# EAGLE board OpenBook_EBookReader_PCB_updated (EAGLE 9.7.0)
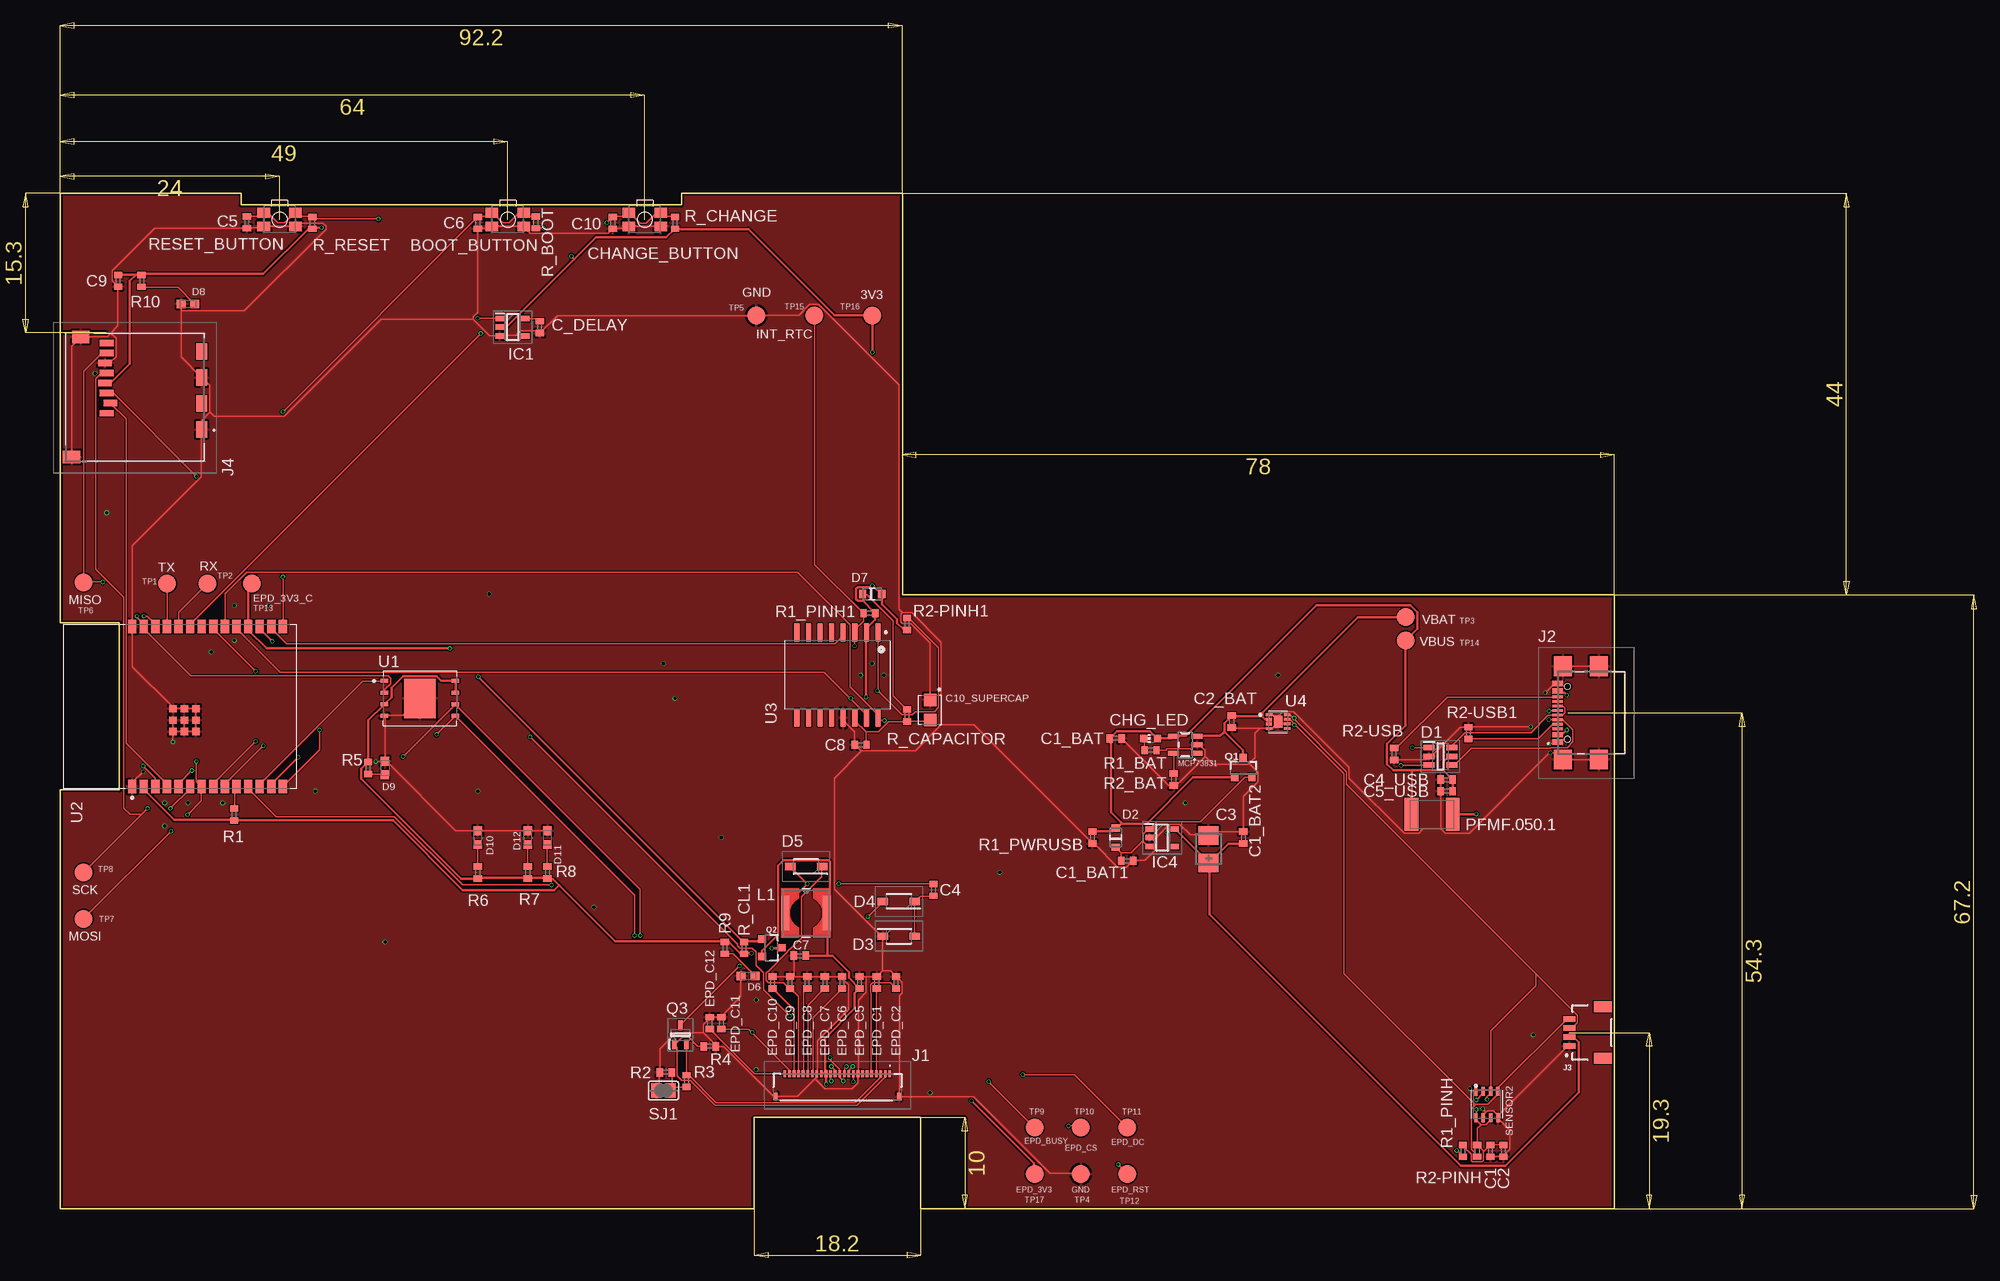
[diagram p0: board, top side]
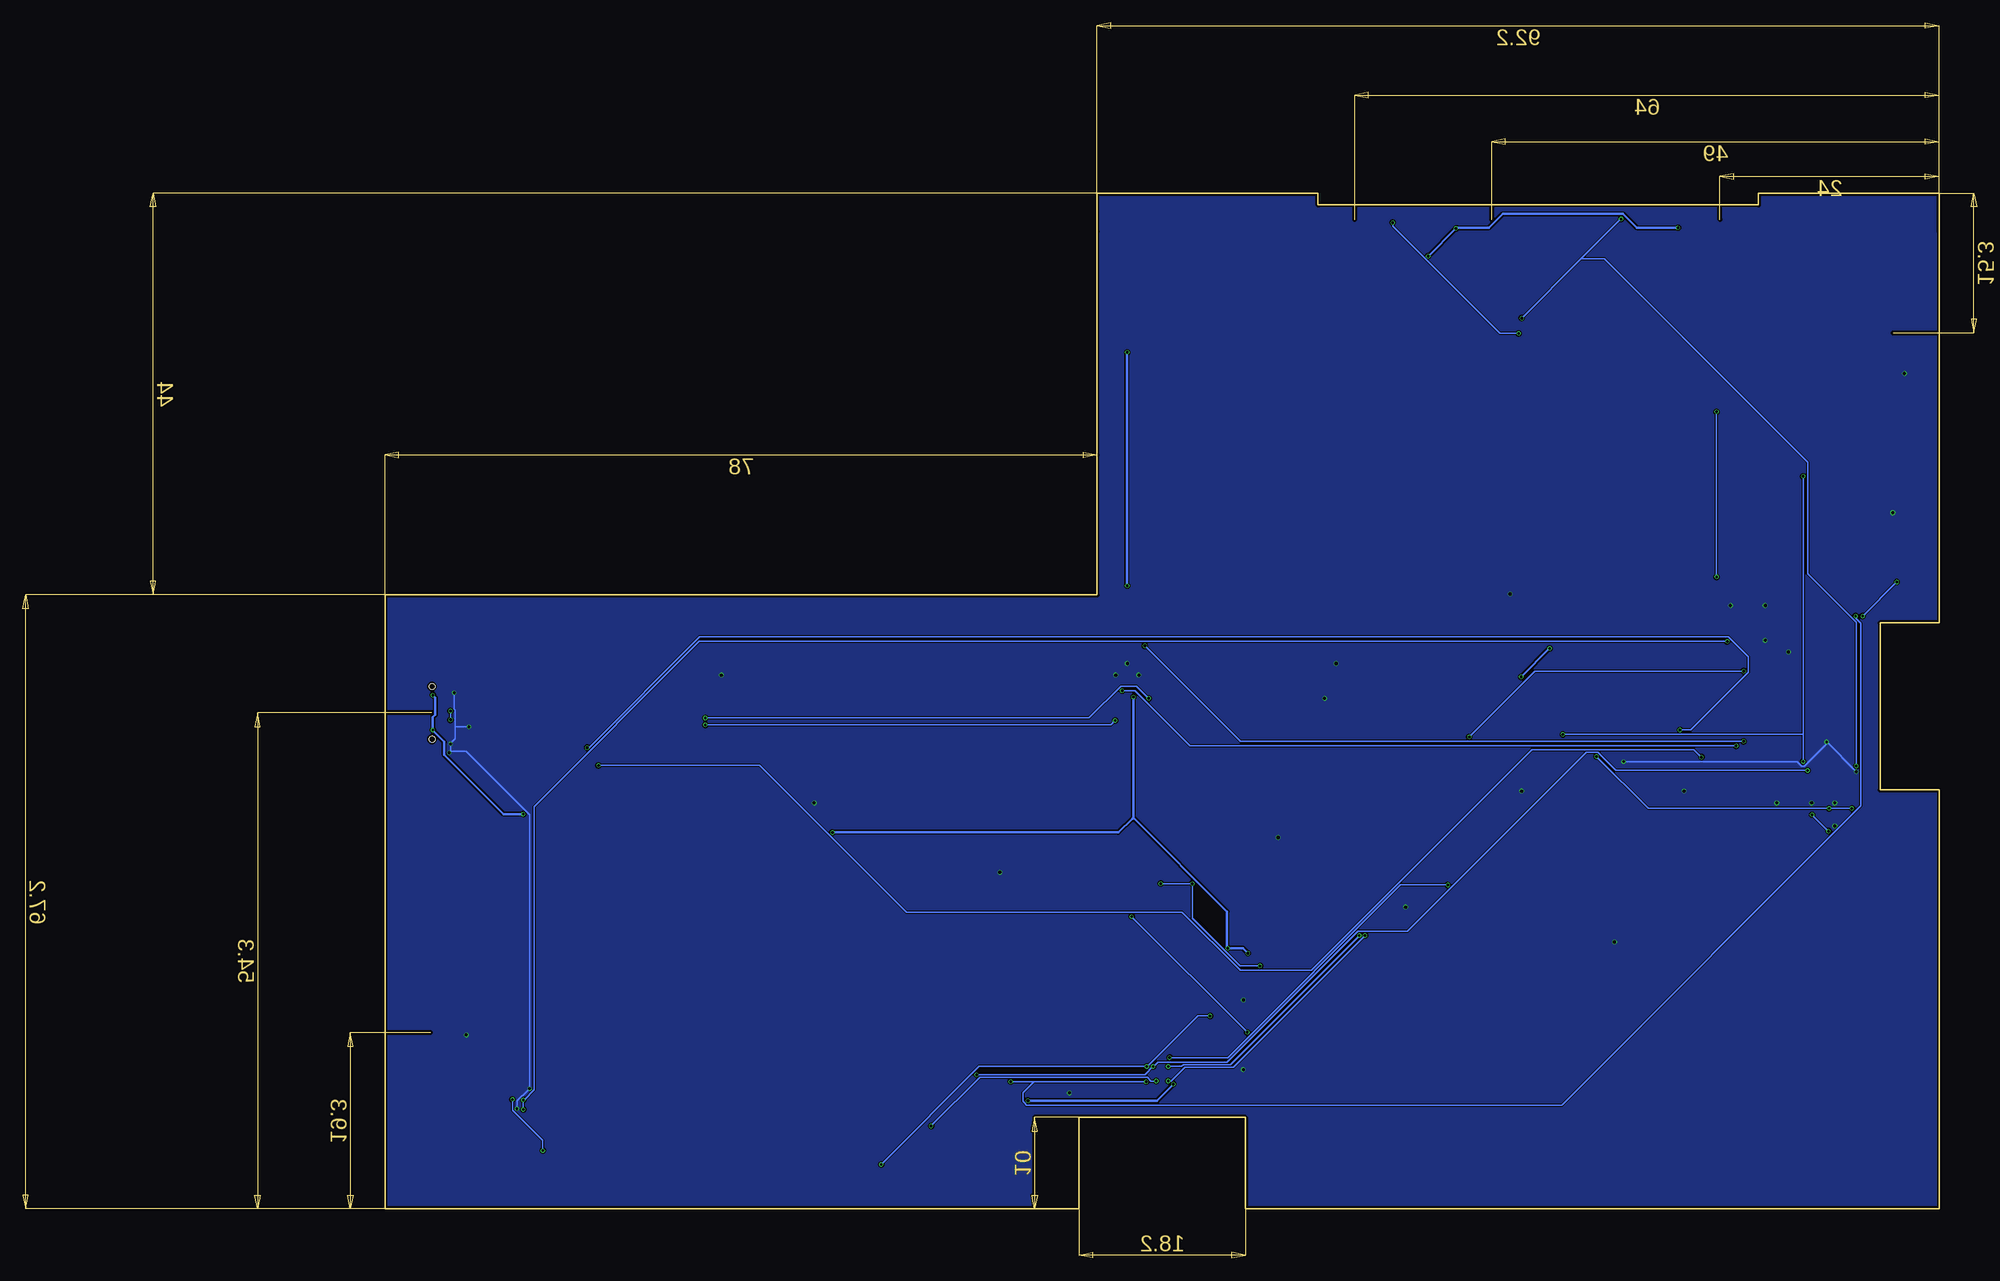
[diagram p1: board, bottom side, seen from below]

Size 170.2 x 111.2 mm. Coordinates in mm from the lower left corner, seen from the top.
Outline: 0,111.2 0,64.14 6.47,64.14 6.47,45.85 0,45.85 0,0 75.99,0 75.99,10 94.19,10 94.19,0 170.2,0 170.2,67.2 92.2,67.2 92.2,111.2 68,111.2 68,109.91 19.8,109.91 19.8,111.2 0,111.2
Copper layers (1*16): Top 0.035mm / dielectric 1.6mm / Bottom 0.035mm
Design rules "jlcpcb-2layers.dru *": minimum track width 0.15mm, minimum drill 0.3mm, track to track 5mil, track to pad 5mil, pad to pad 5mil, via to via 5mil, smd to smd 5mil, copper to edge 0.2mm, drill to drill 6mil, minimum pad ring 10mil, minimum via ring 3mil, stop-mask expansion 4mil, vias tented up to drill 0mil, thermal gap 10mil
Net classes: 1 PowerSignals: width 0.3 mm

## Footprints (pad centres in the part's own frame; a part is rotated, then mirrored left to right if it is on the bottom)
MYBUTTON = smd 1.4 x 1.05: 1 1.75,0.75; 2 -1.75,0.75; 3 -1.75,-0.75; 4 1.75,-0.75
ESP32_WROVER_EAGLE-LTSPICE_C0402 = smd 0.7 x 0.9: 1 -0.65,0; 2 0.65,0
RCL_CT3528 = smd 2 x 2.2: + -1.5,0; - 1.5,0
CAPCP3225X100N = smd 1.4 x 1.4: 1 -1.1,0; 2 1.1,0
ADAFRUIT_CHIP-LED0603 = smd 0.8 x 0.8: A 0,-0.75; C 0,0.75
SOT95P280X145-6N = smd 1.2 x 0.6: 1 -1.25,0.95; 2 -1.25,0; 3 -1.25,-0.95; 4 1.25,-0.95; 5 1.25,0; 6 1.25,0.95
ESP32_WROVER_AVX---SD0805S020S1R0_AVX_SD0805S020S1R0_0 = smd 0.8 x 0.9: 1 -1.05,0; 2 1.05,0
SOD3716X135N = smd 1.15 x 0.8: 1 -1.75,0; 2 1.75,0
DIOC1608X36N = smd 0.97 x 0.94: 1 -0.75,0; 2 0.75,0
SOT95P280X125-5N = smd 0.9 x 0.6: 1 -1.4,0.95; 2 -1.4,0; 3 -1.4,-0.95; 4 1.4,-0.95; 5 1.4,0.95
SOT95P280X120-5N = smd 0.9 x 0.6: 1 -1.4,0.95; 2 -1.4,0; 3 -1.4,-0.95; 4 1.4,-0.95; 5 1.4,0.95
FH34SRJ24S05SH99 = smd 0.3 x 0.8: 1 5.75,1.45; 2 5.25,1.45; 3 4.75,1.45; 4 4.25,1.45; 5 3.75,1.45; 6 3.25,1.45; 7 2.75,1.45; 8 2.25,1.45; 9 1.75,1.45; 10 1.25,1.45; 11 0.75,1.45; 12 0.25,1.45; 13 -0.25,1.45; 14 -0.75,1.45; 15 -1.25,1.45; 16 -1.75,1.45; 17 -2.25,1.45; 18 -2.75,1.45; 19 -3.25,1.45; 20 -3.75,1.45; 21 -4.25,1.45; 22 -4.75,1.45; 23 -5.25,1.45; 24 -5.75,1.45 | smd 0.4 x 0.8: MP1 6.75,-1.05; MP2 -6.75,-1.05
SAMACSYS_PARTS_USB4110GFA = smd 0.3 x 1.15: A1 -3.35,3.678; A4 -2.55,3.678; A5 -1.25,3.678; A6 -0.25,3.678; A7 0.25,3.678; A8 1.25,3.678; A9 2.55,3.678; A12 3.35,3.678; B1 3.05,3.678; B4 2.25,3.678; B5 1.75,3.678; B6 0.75,3.678; B7 -0.75,3.678; B8 -1.75,3.678; B9 -2.25,3.678; B12 -3.05,3.678 | smd 2.18 x 2: MP1 -5.11,-0.827; MP2 5.11,-0.827; MP3 -5.11,3.103; MP4 5.11,3.103 | hole 0.65: -2.89,2.603; 2.89,2.603
JST04_1MM_RA = smd 0.6 x 1.35: 1 -1.5,0; 2 -0.5,0; 3 0.5,0; 4 1.5,0 | smd 1.2 x 2: NC1 2.8,-3.675; NC2 -2.8,-3.675
112ATAARR03ATTEND = smd 1.8 x 1.2: G1 10.6,10.4; G2 4.9,10.4; S1 7.75,10.4; S2 2.05,10.4 | smd 1.4 x 1.9: G3 13.6,-3.85; G4 0.45,-2.85 | smd 0.7 x 1.5: P1 8.8,0; P2 7.7,0.4; P3 6.6,0; P4 5.5,-0.2; P5 4.4,0; P6 3.3,-0.2; P7 2.2,0; P8 1.1,0
IND_4828-WE-TPC_WRE = smd 0.889 x 3.81: 1 -2.286,0; 2 2.286,0
ESP32_WROVER_SPARKFUN-IC-POWER_SOT23-5 = smd 0.55 x 1.2: 1 -0.95,-1.3; 2 0,-1.3; 3 0.95,-1.3; 4 0.95,1.3; 5 -0.95,1.3
ESP32C6_VARISTOR_CT/CN1812 = smd 1.5 x 3.6: 1 -2.25,0; 2 2.25,0
ESP32_WROVER_SPARKFUN-DISCRETESEMI_SOT23-3 = smd 0.8 x 0.9: 1 -0.95,-1; 2 0.95,-1; 3 0,1.1
SOT65P210X110-3N = smd 1.05 x 0.5: 1 -1.05,0.65; 2 -1.05,-0.65; 3 1.05,0
ESP32_WROVER_EAGLE-LTSPICE_R0402 = smd 0.7 x 0.9: 1 -0.65,0; 2 0.65,0
ESP32_WROVER_BME680_PSON80P300X300X100-8N = smd 1.016 x 0.5: 1 1.458,1.2; 2 1.458,0.4; 3 1.458,-0.4; 4 1.458,-1.2; 5 -1.458,-1.22; 6 -1.458,-0.4; 7 -1.458,0.4; 8 -1.458,1.2
SJ = smd 1.168 x 1.6: 1 -0.762,0; 2 0.762,0
TP20R = smd 2 x 2: TP 0,0
SON127P600X800X80-9N = smd 0.94 x 0.44: 1 -3.895,1.905; 2 -3.895,0.635; 3 -3.895,-0.635; 4 -3.895,-1.905; 5 3.895,-1.905; 6 3.895,-0.635; 7 3.895,0.635; 8 3.895,1.905 | smd 3.4 x 4.3: 9 0,0
XCVR_ESP32-C6-WROOM-1-N8 = smd 1.5 x 0.9: 1 -8.75,5.26; 2 -8.75,3.99; 3 -8.75,2.72; 4 -8.75,1.45; 5 -8.75,0.18; 6 -8.75,-1.09; 7 -8.75,-2.36; 8 -8.75,-3.63; 9 -8.75,-4.9; 10 -8.75,-6.17; 11 -8.75,-7.44; 12 -8.75,-8.71; 13 -8.75,-9.98; 14 -8.75,-11.25; 15 8.75,-11.25; 16 8.75,-9.98; 17 8.75,-8.71; 18 8.75,-7.44; 19 8.75,-6.17; 20 8.75,-4.9; 21 8.75,-3.63; 22 8.75,-2.36; 23 8.75,-1.09; 24 8.75,0.18; 25 8.75,1.45; 26 8.75,2.72; 27 8.75,3.99; 28 8.75,5.26 | smd 0.8 x 0.8: 29_1 -2.755,0.79; 29_2 -1.505,0.79; 29_3 -0.255,0.79; 29_4 -2.755,-0.46; 29_5 -1.505,-0.46; 29_6 -0.255,-0.46; 29_7 -2.755,-1.71; 29_8 -1.505,-1.71; 29_9 -0.255,-1.71
SOIC127P1032X265-16N = smd 2.05 x 0.59: 1 -4.655,4.445; 2 -4.655,3.175; 3 -4.655,1.905; 4 -4.655,0.635; 5 -4.655,-0.635; 6 -4.655,-1.905; 7 -4.655,-3.175; 8 -4.655,-4.445; 9 4.655,-4.445; 10 4.655,-3.175; 11 4.655,-1.905; 12 4.655,-0.635; 13 4.655,0.635; 14 4.655,1.905; 15 4.655,3.175; 16 4.655,4.445
SON50P200X200X80-9N = smd 0.76 x 0.27: 1 -0.985,0.75; 4 -0.985,-0.75; 5 0.985,-0.75; 6 0.985,-0.25; 7 0.985,0.25; 8 0.985,0.75 | smd 0.762 x 0.381: 2 -0.985,0.25; 3 -0.985,-0.25 | smd 0.9 x 1.3: 9 0,0

## Placement (x,y rotation side)
BOOT_BUTTON  BUTTON_CUSYOMV1  [MYBUTTON]  49,108.3 180 top
C1  100nF  [ESP32_WROVER_EAGLE-LTSPICE_C0402]  156.6,6.35 270 top
C1_BAT  4.7uF  [ESP32_WROVER_EAGLE-LTSPICE_C0402]  115.57,51.5 0 top
C1_BAT1  4.7uF  [ESP32_WROVER_EAGLE-LTSPICE_C0402]  116.84,38.1 0 top
C1_BAT2  4.7uF  [ESP32_WROVER_EAGLE-LTSPICE_C0402]  129.54,40.64 90 top
C2  100nF  [ESP32_WROVER_EAGLE-LTSPICE_C0402]  158.03,6.35 270 top
C2_BAT  4.7uF  [ESP32_WROVER_EAGLE-LTSPICE_C0402]  128.27,53.34 270 top
C3  100uF TANT  [RCL_CT3528]  125.73,39.37 90 top
C4  4.7uF/25V  [ESP32_WROVER_EAGLE-LTSPICE_C0402]  95.63,34.92 90 top
C4_USB  100nF  [ESP32_WROVER_EAGLE-LTSPICE_C0402]  151.8,46.99 180 top
C5  1uF  [ESP32_WROVER_EAGLE-LTSPICE_C0402]  20.42,108 270 top
C5_USB  4.7uF  [ESP32_WROVER_EAGLE-LTSPICE_C0402]  151.8,45.72 180 top
C6  100nF  [ESP32_WROVER_EAGLE-LTSPICE_C0402]  45.72,107.95 270 top
C7  10uF  [ESP32_WROVER_EAGLE-LTSPICE_C0402]  80.96,27.73 180 top
C8  100nF  [ESP32_WROVER_EAGLE-LTSPICE_C0402]  87.63,50.8 180 top
C9  100nF  [ESP32_WROVER_EAGLE-LTSPICE_C0402]  6.35,101.6 270 top
C10  100nF  [ESP32_WROVER_EAGLE-LTSPICE_C0402]  60.5,107.95 270 top
C10_SUPERCAP  CPH3225A  [CAPCP3225X100N]  95.25,54.61 270 top
C_DELAY  100nF  [ESP32_WROVER_EAGLE-LTSPICE_C0402]  52.5,96.52 270 top
CHANGE_BUTTON  BUTTON_CUSYOMV1  [MYBUTTON]  64,108.3 180 top
CHG_LED  [ADAFRUIT_CHIP-LED0603]  119.38,51.5 90 top
D1  USBLC6-2SC6Y  [SOT95P280X145-6N]  151.13,49.53 0 top
D2  ESP32_WROVER_AVX---SD0805S020S1R0_AVX_SD0805S020S1R0_0_0AVX_SD0805S020S1R0_0_0  [ESP32_WROVER_AVX---SD0805S020S1R0_AVX_SD0805S020S1R0_0]  115.57,40.64 90 top
D3  MBR0530  [SOD3716X135N]  91.82,29.84 0 top
D4  MBR0530  [SOD3716X135N]  91.82,33.66 180 top
D5  MBR0530  [SOD3716X135N]  81.66,37.47 180 top
D6  PGB1010603MR  [DIOC1608X36N]  75.31,25.5 0 top
D7  SD0805S020S1R0  [ESP32_WROVER_AVX---SD0805S020S1R0_AVX_SD0805S020S1R0_0]  88.9,67.31 0 top
D8  PGB1010603MR  [DIOC1608X36N]  13.97,99.06 0 top
D9  PGB1010603MR  [DIOC1608X36N]  35.56,48.26 270 top
D10  PGB1010603MR  [DIOC1608X36N]  45.72,40.64 270 top
D11  PGB1010603MR  [DIOC1608X36N]  51.2,40.64 270 top
D12  PGB1010603MR  [DIOC1608X36N]  53.34,40.64 270 top
EPD_C1  1uF/50V  [ESP32_WROVER_EAGLE-LTSPICE_C0402]  89.41,24.77 90 top
EPD_C2  1uF/50V  [ESP32_WROVER_EAGLE-LTSPICE_C0402]  91.52,24.77 90 top
EPD_C5  0.1uF/50V  [ESP32_WROVER_EAGLE-LTSPICE_C0402]  87.52,24.77 90 top
EPD_C6  1uF/50V  [ESP32_WROVER_EAGLE-LTSPICE_C0402]  85.6,24.77 90 top
EPD_C7  1uF/50V  [ESP32_WROVER_EAGLE-LTSPICE_C0402]  83.72,24.77 90 top
EPD_C8  1uF/50V  [ESP32_WROVER_EAGLE-LTSPICE_C0402]  81.79,24.77 90 top
EPD_C9  1uF/50V  [ESP32_WROVER_EAGLE-LTSPICE_C0402]  79.92,24.77 90 top
EPD_C10  1uF/50V  [ESP32_WROVER_EAGLE-LTSPICE_C0402]  77.98,24.77 90 top
EPD_C11  1uF/50V  [ESP32_WROVER_EAGLE-LTSPICE_C0402]  72.39,20.32 90 top
EPD_C12  1uF/50V  [ESP32_WROVER_EAGLE-LTSPICE_C0402]  71.12,20.32 90 top
IC1  BD5229G-TR  [SOT95P280X125-5N]  49.53,96.52 0 top
IC4  XC6220A331MR-G  [SOT95P280X120-5N]  120.65,40.64 0 top
J1  FH34SRJ-24S-0.5SH_99_  [FH34SRJ24S05SH99]  85.09,13.33 0 top
J2  SAMACSYS_PARTS_USB4110-GF-A  [SAMACSYS_PARTS_USB4110GFA]  167.64,54.3 90 top
J3  QWIIC_RIGHT_ANGLE  [JST04_1MM_RA]  165.25,19.3 90 top
J4  112A-TAAR-R03_ATTEND  [112ATAARR03ATTEND]  5.08,95.9 270 top
L1  68uH  [IND_4828-WE-TPC_WRE]  81.66,32.38 0 top
MCP73831  ESP32_WROVER_SPARKFUN-IC-POWER_MCP73831  [ESP32_WROVER_SPARKFUN-IC-POWER_SOT23-5]  123.19,50.8 90 top
PFMF.050.1  ESP32C6_VARISTORCN1812  [ESP32C6_VARISTOR_CT/CN1812]  150.2,43.18 180 top
Q1  20V/4.2A/52mΩ/1.4W  [ESP32_WROVER_SPARKFUN-DISCRETESEMI_SOT23-3]  129.54,48.26 0 top
Q2  20V/4.2A/52mΩ/1.4W  [ESP32_WROVER_SPARKFUN-DISCRETESEMI_SOT23-3]  77.85,28.57 270 top
Q3  SI1308EDL-T1-GE3  [SOT65P210X110-3N]  67.89,19.05 90 top
R1  10K  [ESP32_WROVER_EAGLE-LTSPICE_R0402]  19.05,43.18 90 top
R1_BAT  200  [ESP32_WROVER_EAGLE-LTSPICE_R0402]  119.38,50.2 180 top
R1_PINH  10K  [ESP32_WROVER_EAGLE-LTSPICE_R0402]  153.6,6.35 90 top
R1_PINH1  10K  [ESP32_WROVER_EAGLE-LTSPICE_R0402]  88.6,65.2 0 top
R1_PWRUSB  100K  [ESP32_WROVER_EAGLE-LTSPICE_R0402]  113.03,40.64 90 top
R2  2.2  [ESP32_WROVER_EAGLE-LTSPICE_R0402]  66.29,14.93 0 top
R2-PINH  10K  [ESP32_WROVER_EAGLE-LTSPICE_R0402]  155.15,6.35 90 top
R2-PINH1  10K  [ESP32_WROVER_EAGLE-LTSPICE_R0402]  92.71,64.03 270 top
R2-USB  5k1  [ESP32_WROVER_EAGLE-LTSPICE_R0402]  146.05,49.8 270 top
R2-USB1  5k1  [ESP32_WROVER_EAGLE-LTSPICE_R0402]  154.2,52.07 270 top
R2_BAT  2K  [ESP32_WROVER_EAGLE-LTSPICE_R0402]  121.92,46.99 90 top
R3  0.47  [ESP32_WROVER_EAGLE-LTSPICE_R0402]  68.58,13.97 270 top
R4  10K  [ESP32_WROVER_EAGLE-LTSPICE_R0402]  71.12,17.78 0 top
R5  10K  [ESP32_WROVER_EAGLE-LTSPICE_R0402]  33.7,48.26 90 top
R6  10K  [ESP32_WROVER_EAGLE-LTSPICE_R0402]  45.72,36.83 270 top
R7  10K  [ESP32_WROVER_EAGLE-LTSPICE_R0402]  51.2,36.83 270 top
R8  10K  [ESP32_WROVER_EAGLE-LTSPICE_R0402]  53.34,36.83 270 top
R9  10K  [ESP32_WROVER_EAGLE-LTSPICE_R0402]  72.77,28.57 90 top
R10  10K  [ESP32_WROVER_EAGLE-LTSPICE_R0402]  8.89,101.6 90 top
R_BOOT  10K  [ESP32_WROVER_EAGLE-LTSPICE_R0402]  52.07,108 90 top
R_CAPACITOR  15  [ESP32_WROVER_EAGLE-LTSPICE_R0402]  92.71,54 90 top
R_CHANGE  10K  [ESP32_WROVER_EAGLE-LTSPICE_R0402]  67.31,107.95 90 top
R_CL1  10K  [ESP32_WROVER_EAGLE-LTSPICE_R0402]  74.86,28.57 90 top
R_RESET  10K  [ESP32_WROVER_EAGLE-LTSPICE_R0402]  27.6,107.95 90 top
RESET_BUTTON  BUTTON_CUSYOMV1  [MYBUTTON]  24,108.3 180 top
SENSOR2  BME688  [ESP32_WROVER_BME680_PSON80P300X300X100-8N]  156.21,11.43 90 top
SJ1  [SJ]  66.04,12.94 0 top
TP1  TPTP20R  [TP20R]  11.68,68.45 0 top
TP2  TPTP20R  [TP20R]  16.13,68.45 0 top
TP3  TPTP20R  [TP20R]  147.32,64.77 0 top
TP4  TPTP20R  [TP20R]  111.76,3.81 0 top
TP5  TPTP20R  [TP20R]  76.2,97.79 0 top
TP6  TPTP20R  [TP20R]  2.54,68.58 0 top
TP7  TPTP20R  [TP20R]  2.54,31.75 0 top
TP8  TPTP20R  [TP20R]  2.54,36.83 0 top
TP9  TPTP20R  [TP20R]  106.68,8.89 0 top
TP10  TPTP20R  [TP20R]  111.76,8.89 0 top
TP11  TPTP20R  [TP20R]  116.84,8.89 0 top
TP12  TPTP20R  [TP20R]  116.84,3.81 0 top
TP13  TPTP20R  [TP20R]  20.95,68.45 0 top
TP14  TPTP20R  [TP20R]  147.32,62.23 0 top
TP15  TPTP20R  [TP20R]  82.55,97.79 0 top
TP16  TPTP20R  [TP20R]  88.9,97.79 0 top
TP17  TPTP20R  [TP20R]  106.68,3.81 0 top
U1  W25Q512JVEIQ  [SON127P600X800X80-9N]  39.37,55.88 0 top
U2  ESP32-C6-WROOM-1-N8  [XCVR_ESP32-C6-WROOM-1-N8]  13.12,55 90 top
U3  DS3231SN#  [SOIC127P1032X265-16N]  85.09,58.42 270 top
U4  MAX17048G+T10  [SON50P200X200X80-9N]  133.35,53.34 0 top

## Library data of the parts
BOOT_BUTTON CHANGE_BUTTON CHG_LED PFMF.050.1 RESET_BUTTON SJ1 = DeskAssistant v19 v1
C1 C1_BAT C1_BAT1 C1_BAT2 C2 C2_BAT C4 C4_USB C5 C5_USB C6-C10 C_DELAY EPD_C1 EPD_C2 EPD_C5-EPD_C12 = DeskAssistant v19 v1; SPICEMODEL: NONE; SPICEPREFIX: C
C3 = DeskAssistant v19 v1; SPICEPREFIX: C
C10_SUPERCAP = DeskAssistant v19 v1; AVAILABILITY: Not in stock; CHECK_PRICES: https://www.snapeda.com/parts/CPH3225A/Seiko+Instruments/view-part/?ref=eda; DESCRIPTION: 11 mF (EDLC) Supercapacitor 3.3 V 1210 (3225 Metric) - -; MF: Seiko Instruments; MP: CPH3225A; PACKAGE: 1210 Seiko; PRICE: None; PURCHASE-URL: https://www.snapeda.com/api/url_track_click_mouser/?unipart_id=562593&manufacturer=Seiko Instruments&part_name=CPH3225A&search_term=None; SNAPEDA_LINK: https://www.snapeda.com/parts/CPH3225A/Seiko+Instruments/view-part/?ref=snap
D1 = DeskAssistant v19 v1; AVAILABILITY: In Stock; CHECK_PRICES: https://www.snapeda.com/parts/USBLC6-2SC6Y/STMicroelectronics/view-part/?ref=eda; DESCRIPTION: 17V Clamp 5A (8/20µs) Ipp Tvs Diode Surface Mount SOT-23-6; MF: STMicroelectronics; MP: USBLC6-2SC6Y; PACKAGE: SOT-23-6 STMicroelectronics; PRICE: None; SNAPEDA_LINK: https://www.snapeda.com/parts/USBLC6-2SC6Y/STMicroelectronics/view-part/?ref=snap
D2 D7 = DeskAssistant v19 v1; CENTROID_NOT_SPECIFIED: No; DATASHEET: http://datasheets.avx.com/schottky.pdf; DIGIKEY_DESCRIPTION: DIODE SCHOTTKY 20V 1A 0805; DIGIKEY_PART_NUMBER: 478-7800-1-ND; LEAD_FREE: yes; MF: AVX; MOUSER_PART_NUMBER: 581-SD0805S020S1R0; PACKAGE: 0805 (2012 metric); PREFIX: D; ROHS: yes; TEMPERATURE_RANGE_HIGH: +125°C; TEMPERATURE_RANGE_LOW: -55°C
D3-D5 = DeskAssistant v19 v1; AVAILABILITY: In Stock; CHECK_PRICES: https://www.snapeda.com/parts/MBR0530/Onsemi/view-part/?ref=eda; DESCRIPTION: Diode Schottky 30 V 500mA Surface Mount SOD-123; MF: ON Semiconductor; MP: MBR0530; PACKAGE: SOD-123-2 ON Semiconductor; PRICE: None; PURCHASE-URL: https://www.snapeda.com/api/url_track_click_mouser/?unipart_id=179458&manufacturer=ON Semiconductor&part_name=MBR0530&search_term=None; SNAPEDA_LINK: https://www.snapeda.com/parts/MBR0530/Onsemi/view-part/?ref=snap
D6 D8-D12 = DeskAssistant v19 v1; AVAILABILITY: In Stock; CHECK_PRICES: https://www.snapeda.com/parts/PGB1010603MR/Littelfuse/view-part/?ref=eda; DESCRIPTION: 150V (Typ) Clamp - Ipp Tvs Diode Surface Mount 0603 (1608 Metric); MF: Littelfuse Inc.; MP: PGB1010603MR; PACKAGE: 0603 Littelfuse Inc.; PRICE: None; PURCHASE-URL: https://www.snapeda.com/api/url_track_click_mouser/?unipart_id=5659453&manufacturer=Littelfuse Inc.&part_name=PGB1010603MR&search_term=None; SNAPEDA_LINK: https://www.snapeda.com/parts/PGB1010603MR/Littelfuse/view-part/?ref=snap
IC1 = DeskAssistant v19 v1; DESCRIPTION: Voltage Detector with Adjustable Delay Time: CMOS processes are utilized to develop high precision, low current consumption CMOS reset ICs that allow arbitrary setting of the delay time. The extensive lineup includes both Nch Open Drain and CMOS output types in a wide range of detection voltages (from 2.3V to 6.0V, in 0.1V steps), enabling selection of the ideal solution based on customer requirements. In addition, the entire series is of course both lead-free and RoHS-compliant.; HEIGHT: 1.25mm; MANUFACTURER_NAME: ROHM Semiconductor; MANUFACTURER_PART_NUMBER: BD5229G-TR; MOUSER_PART_NUMBER: 755-BD5229G-TR; MOUSER_PRICE-STOCK: https://www.mouser.co.uk/ProductDetail/ROHM-Semiconductor/BD5229G-TR?qs=4kLU8WoGk0vvnhrrYwdszw%3D%3D
IC4 = DeskAssistant v19 v1; DESCRIPTION: LDO Voltage Regulators; HEIGHT: 1.2mm; MANUFACTURER_NAME: Torex; MANUFACTURER_PART_NUMBER: XC6220A331MR-G; MOUSER_PART_NUMBER: 865-XC6220A331MR-G; MOUSER_PRICE-STOCK: https://www.mouser.co.uk/ProductDetail/Torex-Semiconductor/XC6220A331MR-G?qs=AsjdqWjXhJ8ZSWznL1J0gg%3D%3D
J1 = DeskAssistant v19 v1; DESCRIPTION: 24 Position FFC, FPC Connector Contacts, Top and Bottom 0.020" (0.50mm) Surface Mount, Right Angle; HEIGHT: 1.1mm; MANUFACTURER_NAME: Hirose; MANUFACTURER_PART_NUMBER: FH34SRJ-24S-0.5SH(99); MOUSER_PART_NUMBER: 798-FH34SRJ24S05SH99; MOUSER_PRICE-STOCK: https://www.mouser.co.uk/ProductDetail/Hirose-Connector/FH34SRJ-24S-0.5SH99?qs=vcbW%252B4%252BSTIpKBl5ap9J8Fw%3D%3D
J2 = DeskAssistant v19 v1; DESCRIPTION: CONN USB 2.0 TYPE-C R/A SMT; HEIGHT: 3.26mm; MANUFACTURER_NAME: GCT (GLOBAL CONNECTOR TECHNOLOGY); MANUFACTURER_PART_NUMBER: USB4110-GF-A; MOUSER_PART_NUMBER: 640-USB4110-GF-A; MOUSER_PRICE-STOCK: https://www.mouser.co.uk/ProductDetail/GCT/USB4110-GF-A?qs=KUoIvG%2F9IlYiZvIXQjyJeA%3D%3D
J3 = DeskAssistant v19 v1; PROD_ID: CONN-13694
J4 = DeskAssistant v19 v1; DESCRIPTION: Micro SD Card Socket, Push-Push Type, Top Mount, SMT, H=1.83mm, 10u; HEIGHT: 1.9mm; MANUFACTURER_NAME: ATTEND; MANUFACTURER_PART_NUMBER: 112A-TAAR-R03 ATTEND
L1 = DeskAssistant v19 v1; COPYRIGHT: Copyright (C) 2024 Ultra Librarian. All rights reserved.; MANUFACTURER_PART_NUMBER: 744043680; MFR_NAME: Wurth Electronics
MCP73831 = DeskAssistant v19 v1; PROD_ID: IC-09995
Q1 Q2 = DeskAssistant v19 v1; PROD_ID: TRAN-14388
Q3 = DeskAssistant v19 v1; AVAILABILITY: In Stock; CHECK_PRICES: https://www.snapeda.com/parts/SI1308EDL-T1-GE3/Vishay+Siliconix/view-part/?ref=eda; DESCRIPTION: Si1308EDL-T1-GE3 N-channel MOSFET Transistor, 1.5 A, 30 V, 3-Pin SC-70 | Siliconix / Vishay SI1308EDL-T1-GE3; MF: Vishay Siliconix; MP: SI1308EDL-T1-GE3; PACKAGE: SOT-323 Vishay Semiconductor; PRICE: None; PURCHASE-URL: https://www.snapeda.com/api/url_track_click_mouser/?unipart_id=274603&manufacturer=Vishay Siliconix&part_name=SI1308EDL-T1-GE3&search_term=None; SNAPEDA_LINK: https://www.snapeda.com/parts/SI1308EDL-T1-GE3/Vishay+Siliconix/view-part/?ref=snap
R1 R1_BAT R1_PINH R1_PINH1 R1_PWRUSB R2 R2-PINH R2-PINH1 R2-USB R2-USB1 R2_BAT R3-R10 R_BOOT R_CAPACITOR R_CHANGE R_CL1 R_RESET = DeskAssistant v19 v1; SPICEMODEL: NONE; SPICEPREFIX: R
SENSOR2 = DeskAssistant v19 v1; AVAILABILITY: Unavailable; DESCRIPTION: Integrated Environmental Unit; MF: Bosch Sensortec; MP: BME680; PACKAGE: LGA-8 Bosch Tools; PRICE: None
TP1 = DeskAssistant v19 v1; 3D_TX: TX
TP2 = DeskAssistant v19 v1; 3D_RX: RX
TP3 = DeskAssistant v19 v1; 3D_VBAT: VBAT
TP4 = DeskAssistant v19 v1; 3D_GND1: GND
TP5 = DeskAssistant v19 v1; 3D_GND: GND
TP6 = DeskAssistant v19 v1; 3D_MISO: MISO
TP7 = DeskAssistant v19 v1; MOSI: MOSI
TP8 = DeskAssistant v19 v1; 3D_SCK: SCK
TP9 = DeskAssistant v19 v1; 3D_EPD_BUSY: EPD_BUSY
TP10 = DeskAssistant v19 v1; 3D_EPD_CS: EPD_CS
TP11 = DeskAssistant v19 v1; 3D_EPD_DC: EPD_DC
TP12 = DeskAssistant v19 v1; 3D_EPD_RST: EPD_RST
TP13 = DeskAssistant v19 v1; 3D_EPD_3V3_C: EPD_3V3_C
TP14 = DeskAssistant v19 v1; 3D_VBUS: VBUS
TP15 = DeskAssistant v19 v1; 3D_INT_RTC: INT_RTC
TP16 = DeskAssistant v19 v1; 3D_3V3: 3V3
TP17 = DeskAssistant v19 v1; 3D_EPD_3V3: EPD_3V3
U1 = DeskAssistant v19 v1; AVAILABILITY: In Stock; CHECK_PRICES: https://www.snapeda.com/parts/W25Q512JVEIQ/Winbond+Electronics/view-part/?ref=eda; DESCRIPTION: FLASH - NOR Memory IC 512Mb (64M x 8) SPI - Quad I/O 133 MHz 8-WSON (8x6); MF: Winbond Electronics; MP: W25Q512JVEIQ; PACKAGE: Package; PRICE: None; SNAPEDA_LINK: https://www.snapeda.com/parts/W25Q512JVEIQ/Winbond+Electronics/view-part/?ref=snap
U2 = DeskAssistant v19 v1; AVAILABILITY: In Stock; CHECK_PRICES: https://www.snapeda.com/parts/ESP32-C6-WROOM-1-N8/Espressif+Systems/view-part/?ref=eda; DESCRIPTION: Multiprotocol Modules ESP32-C6 module, Wi-Fi 6 in 2.4 GHz band, Bluetooth 5, Zigbee 3.0 and Thread. ESP34-WROOM Compatible - ENGINEERING SAMPLE; MF: Espressif Systems; MP: ESP32-C6-WROOM-1-N8; PACKAGE: None; PRICE: None; SNAPEDA_LINK: https://www.snapeda.com/parts/ESP32-C6-WROOM-1-N8/Espressif+Systems/view-part/?ref=snap
U3 = DeskAssistant v19 v1; AVAILABILITY: In Stock; CHECK_PRICES: https://www.snapeda.com/parts/DS3231SN%23/Analog+Devices/view-part/?ref=eda; DESCRIPTION: Extremely Accurate I²C-Integrated RTC/TCXO/Crystal; MF: Analog Devices; MP: DS3231SN#; PACKAGE: SOIC-16 Maxim; PRICE: None; PURCHASE-URL: https://www.snapeda.com/api/url_track_click_mouser/?unipart_id=99048&manufacturer=Analog Devices&part_name=DS3231SN#&search_term=None; SNAPEDA_LINK: https://www.snapeda.com/parts/DS3231SN%23/Analog+Devices/view-part/?ref=snap
U4 = DeskAssistant v19 v1; AVAILABILITY: In Stock; CHECK_PRICES: https://www.snapeda.com/parts/MAX17048G+T10/Analog+Devices/view-part/?ref=eda; DESCRIPTION: 3µA 1-Cell/2-Cell Fuel Gauge with ModelGauge; MF: Analog Devices; MP: MAX17048G+T10; PACKAGE: TDFN-8 Maxim; PRICE: None; PURCHASE-URL: https://www.snapeda.com/api/url_track_click_mouser/?unipart_id=329239&manufacturer=Analog Devices&part_name=MAX17048G+T10&search_term=None; SNAPEDA_LINK: https://www.snapeda.com/parts/MAX17048G+T10/Analog+Devices/view-part/?ref=snap

## Nets
3V3 [PowerSignals]: C1_BAT2.1 C3.+ C9.1 D7.2 IC1.2 IC4.5 J3.2 J4.P4 Q2.3 R1.1 R1_PINH1.2 R2-PINH1.2 R5.2 R6.2 R7.2 R8.2 R9.2 R10.2 R_BOOT.1 R_CHANGE.1 R_CL1.1 R_RESET.1 TP16.TP U1.3 U1.7 U1.8 U2.2 U3.2
32KHZ: R2-PINH1.1 U2.9 U3.1
DN: D1.4 J2.A7 J2.B7
DP: D1.6 J2.A6 J2.B6
EPD_3V3 [PowerSignals]: C7.1 EPD_C5.1 J1.15 J1.16 L1.2 Q2.2 TP17.TP
EPD_3V3_C [PowerSignals]: Q2.1 R_CL1.2 TP13.TP U2.18
EPD_BUSY: J1.9 TP9.TP U2.26
EPD_CS: J1.12 TP10.TP U2.11
EPD_DC: J1.11 TP11.TP U2.5
EPD_RST: J1.10 TP12.TP U2.21
FLASH_CS: U1.1 U2.12
GDR: J1.2 Q3.1 R4.1
GND: BOOT_BUTTON.1 BOOT_BUTTON.2 C1.2 C1_BAT1.2 C1_BAT2.2 C1_BAT.2 C2.2 C2_BAT.2 C3.- C4_USB.2 C5.2 C5_USB.2 C6.2 C7.2 C8.2 C9.2 C10.2 C10_SUPERCAP.1 C_DELAY.2 CHANGE_BUTTON.1 CHANGE_BUTTON.2 D1.2 D3.1 D6.1 D8.1 D9.1 D10.1 D11.1 D12.1 EPD_C1.2 EPD_C2.2 EPD_C5.2 EPD_C6.2 EPD_C7.2 EPD_C8.2 EPD_C9.2 EPD_C10.2 EPD_C11.2 EPD_C12.2 IC1.3 IC4.2 J1.8 J1.17 J1.MP1 J1.MP2 J2.A1 J2.A12 J2.B1 J2.B12 J2.MP1 J2.MP2 J2.MP3 J2.MP4 J3.1 J4.G1 J4.G2 J4.G3 J4.G4 J4.P6 MCP73831.2 R1_PWRUSB.1 R2-USB1.1 R2-USB.2 R2.1 R2_BAT.1 R4.2 RESET_BUTTON.1 RESET_BUTTON.2 SENSOR2.1 SENSOR2.5 SENSOR2.7 SJ1.1 TP4.TP TP5.TP U1.4 U1.9 U2.1 U2.28 U2.29_1 U2.29_2 U2.29_3 U2.29_4 U2.29_5 U2.29_6 U2.29_7 U2.29_8 U2.29_9 U3.13 U4.1 U4.4 U4.6 U4.9
GPIO8: R1.2 U2.10
I2C_PW: C1.1 C2.1 R1_PINH.2 R2-PINH.2 SENSOR2.2 SENSOR2.6 SENSOR2.8 U2.17
INT_RTC: R1_PINH1.1 TP15.TP U2.8 U3.3
IO/BOOT: BOOT_BUTTON.3 BOOT_BUTTON.4 C6.1 R_BOOT.2 U2.15
IO/CHANGE: C10.1 CHANGE_BUTTON.3 CHANGE_BUTTON.4 R_CHANGE.2 U2.23
MISO: J4.P7 TP6.TP U1.2 U2.27
MOSI: J1.14 J4.P3 TP7.TP U1.5 U2.7
N$1: C1_BAT1.1 D2.1 IC4.1 IC4.3 Q1.2
N$2: CHG_LED.C R1_BAT.2
N$4: MCP73831.1 R1_BAT.1
N$5: EPD_C12.1 J1.24
N$6: C4.1 D3.2 D4.1
N$7: J2.B5 R2-USB.1
N$8: MCP73831.5 R2_BAT.2
N$9: C_DELAY.1 IC1.5
N$10: EPD_C10.1 J1.22
N$11: J2.A5 R2-USB1.2
N$12: D7.1 R_CAPACITOR.2
N$13: EPD_C8.1 J1.20
N$14: EPD_C7.1 J1.19
N$15: EPD_C6.1 J1.18
N$16: D12.2 R8.1
N$17: D11.2 R7.1
N$18: D10.2 R6.1
N$19: D9.2 R5.1
N$20: D6.2 R9.1
N$21: D8.2 R10.1
N$26: EPD_C2.1 J1.5
N$27: EPD_C1.1 J1.4
PREVGH: D5.1 EPD_C9.1 J1.21
PREVGL: D4.2 EPD_C11.1 J1.23
RESE: J1.3 Q3.2 R3.1
RESE': R2.2 R3.2 SJ1.2
RESET: C5.1 IC1.1 R_RESET.2 RESET_BUTTON.3 RESET_BUTTON.4 U2.3
RTC_RST: U2.16 U3.4
RX: TP2.TP U2.24
SCK: J1.13 J4.P5 TP8.TP U1.6 U2.6
SCL: J3.4 R2-PINH.1 SENSOR2.4 U2.20 U3.16 U4.7
SDA: J3.3 R1_PINH.1 SENSOR2.3 U2.19 U3.15 U4.8
SRC: C4.2 D5.2 L1.1 Q3.3
SS_SD: J4.P2 U2.4
TX: TP1.TP U2.25
USB_D+: D1.1 U2.14
USB_D-: D1.3 U2.13
VBAT [PowerSignals]: C2_BAT.1 MCP73831.3 Q1.3 TP3.TP U4.2 U4.3
VBUS [PowerSignals]: C1_BAT.1 C4_USB.1 C5_USB.1 CHG_LED.A D1.5 D2.2 MCP73831.4 PFMF.050.1.2 Q1.1 R1_PWRUSB.2 TP14.TP
VRTC: C8.1 C10_SUPERCAP.2 R_CAPACITOR.1 U3.14
VUSB [PowerSignals]: J2.A4 J2.A9 J2.B4 J2.B9 PFMF.050.1.1

## Tracks (layer width: path | path; a pad name or v marks a point on that pad's centre or on a via)
3V3  (via drill 0.3)
  Top 0.3: 8.3,102.28 6.37,102.28 C9.1 | J4.P4 4.92,90.44 5.54,90.44 7.62,92.52 7.62,101.6 8.3,102.28 | 56.27,103.98 58.66,106.37 66.34,106.37 67.24,107.27 R_CHANGE.1 67.45,107.27 75.34,107.27 84.76,97.85 88.85,97.85 TP16.TP 88.92,97.64 v88.92,93.76 | 56.27,103.98 48.82,96.53 48.2,96.53 IC1.2 | v52.91,107.34 52.08,107.34 R_BOOT.1 | 56.27,103.98 v55.95,104.29 | v28.6,107.41 27.7,107.41 R_RESET.1 27.56,107.27 27.15,107.27 22.23,102.35 9,102.35 R10.2 8.86,102.28 8.3,102.28 | C3.+ 125.76,37.88 122.09,41.55 IC4.5 121.95,41.48 121.47,41.48 v121.19,41.2 | C1_BAT2.1 129.5,39.96 127.91,39.96 125.9,37.95 C3.+ | J3.2 165.3,18.77 165.72,18.77 166.27,18.21 166.27,12.74 158.24,4.71 153.39,4.71 125.83,32.27 125.83,37.74 C3.+ | U1.7 43.28,56.58 43.28,57.76 U1.8 43.14,57.82 41.69,57.82 41.2,58.31 37.53,58.31 36.29,57.06 36.29,56.02 35.59,55.33 U1.3 35.46,55.19 33.73,53.46 33.73,48.96 R5.2 33.59,48.82 32.96,48.2 32.96,47.09 43.9,36.15 45.57,36.15 R6.2 45.77,36.22 51.18,36.22 R7.2 51.31,36.22 53.32,36.22 R8.2 53.46,36.08 53.95,36.08 54.6,35.42 | U2.2 9.14,46.19 9.14,45.91 12.46,42.59 19.04,42.59 R1.1 19.18,42.52 36.42,42.52 44.04,34.9 54.08,34.9 54.6,35.42 | R2-PINH1.2 92.66,63.43 92.31,63.43 91.62,64.13 91.62,64.54 89.96,66.2 89.96,67.24 D7.2 89.82,67.38 89.12,68.07 88.92,68.07 | 88.92,68.07 87.32,68.07 87.12,67.86 87.12,66.76 87.32,66.55 87.88,66.55 89.12,65.3 R1_PINH1.2 89.19,65.16 89.19,64.47 88.29,63.57 88.29,63.09 U3.2 88.22,62.95 v88.22,56.02 | v77.91,28.53 78.94,28.53 Q2.3 | v75.69,27.98 75,27.98 R_CL1.1 74.86,27.98 74.44,27.98 73.2,29.22 72.78,29.22 R9.2 72.64,29.29 60.73,29.29 54.6,35.42
  Top 0.3: v88.92,68.21 88.92,68.07
  Bottom 0.3: v55.95,104.29 v52.91,107.34 52.77,107.41 49.31,107.41 47.78,108.93 34.62,108.93 33.1,107.41 v28.6,107.41 | v75.69,27.98 76.24,28.53 v77.91,28.53 77.97,28.67 77.97,32.55 88.22,42.8 | 88.22,42.8 v88.22,56.02 | v121.19,41.2 89.89,41.2 88.36,42.73 88.22,42.8 | v88.92,68.21 v88.92,93.76
32KHZ  (via drill 0.3)
  Top 0.15: 89.54,56.72 92.17,54.08 93.28,54.08 93.63,54.43 95.7,54.43 96.19,54.91 96.19,61.42 92.93,64.68 92.73,64.68 R2-PINH1.1 | 89.54,56.72 89.54,63.02 U3.1 | v22.23,50.69 18.07,46.54 18.07,46.26 U2.9 | v89.47,56.72 89.54,56.72
  Bottom 0.15: v22.23,50.69 82.06,50.69 88.09,56.72 v89.47,56.72
DN  (via drill 0.3)
  Top 0.15: D1.4 152.42,48.61 152.7,48.61 154.5,50.41 163.15,50.41 163.22,50.48 165.02,50.48 165.65,51.11 165.65,52.42 164.54,53.53 163.98,53.53 J2.B7 163.91,53.53 v163.01,53.53 | v163.01,54.5 163.91,54.5 J2.A7
  Bottom 0.15: v163.01,53.53 v163.01,54.5
DP
  Top 0.15: J2.B6 163.98,54.98 164.61,54.98 164.75,54.85 164.75,54.29 164.54,54.08 163.98,54.08 J2.A6 163.91,54.02 162.88,54.02 161.01,52.15 153.8,52.15 152.42,50.76 152.42,50.48 D1.6
EPD_3V3  (via drill 0.3)
  Top 0.3: Q2.2 76.87,27.63 76.87,28.25 78.6,29.98 78.6,37.53 79.22,38.16 84.14,38.16 84.28,38.02 84.28,32.69 84,32.41 L1.2 84,32.27 84,27.7 | J1.16 83.38,14.82 83.79,14.82 J1.15 | 84,27.7 81.65,27.7 C7.1 | 84,27.7 84.55,27.7 86.36,25.9 86.36,25.28 87.46,24.17 EPD_C5.1 87.39,24.03 86.98,23.61 86.98,21.95 83.72,18.7 83.72,14.96 J1.15 | v99.79,11.84 106.64,4.99 106.64,3.88 TP17.TP | v83.86,13.64 83.86,14.68 J1.15
  Bottom 0.3: v99.79,11.84 85.66,11.84 v83.86,13.64
EPD_3V3_C  (via drill 0.3)
  Top 0.3: Q2.1 76.8,29.5 76.59,29.29 74.93,29.29 R_CL1.2 74.72,29.29 v45.77,58.24 | TP13.TP 20.91,68.42 20.57,68.07 20.57,63.78 U2.18 20.64,63.64 20.64,63.29 22.58,61.35 v42.66,61.35
  Bottom 0.3: v42.66,61.35 v45.77,58.24
EPD_BUSY  (via drill 0.3)
  Top 0.15: v86.84,13.92 86.84,14.75 J1.9 | v101.66,13.92 106.64,8.93 TP9.TP | v9.14,64.89 9.49,64.89 10.39,63.99 10.39,63.78 U2.26
  Bottom 0.15: v101.66,13.92 99.11,13.92 | v86.84,13.92 99.06,13.92 99.11,13.92 | v9.14,64.89 9.14,64.68 8.59,64.13 8.59,44.11 41.34,11.36 99.93,11.36 100.17,11.6 100.27,11.7 100.33,11.76 100.33,12.7 99.11,13.92
EPD_CS  (via drill 0.3)
  Top 0.15: v85.73,13.99 85.39,14.34 85.39,14.75 J1.12 85.32,14.82 85.32,15.3 84.28,16.34 v84.28,16.55 | v110.39,9.07 111.56,9.07 111.7,8.93 TP10.TP | v53.81,35.46 44.04,35.46 36.56,42.94 23.61,42.94 20.57,45.98 20.57,46.19 U2.11
  Bottom 0.15: v85.73,13.99 86.28,13.99 86.7,14.4 105.05,14.4 v110.39,9.07 | v53.81,35.46 59,35.46 77.91,16.55 v84.28,16.55
EPD_DC  (via drill 0.3)
  Top 0.15: v86.08,15.58 85.87,15.37 85.87,14.82 J1.11 | v105.4,14.68 111.08,14.68 116.83,8.93 TP11.TP | v14.4,47.99 12.95,46.54 U2.5
  Bottom 0.15: v105.4,14.68 86.98,14.68 v86.08,15.58 86.01,15.58 85.52,16.07 77.97,16.07 63.64,30.4 58.24,30.4 38.64,50 37.4,50 35.39,47.99 v14.4,47.99
EPD_RST  (via drill 0.3)
  Top 0.15: v86.77,15.58 86.36,15.17 86.36,14.82 J1.10 | v115.86,4.85 116.83,3.88 TP12.TP | v21.4,58.86 16.76,63.5 16.76,63.71 U2.21 | v51.45,51.66 74.17,28.95 74.17,28.81 74.44,28.53 75.76,28.53 76.17,28.12 76.17,26.66 77.01,25.83 77.01,23.96 v79.84,21.12
  Bottom 0.15: v115.86,4.85 105.12,15.58 v86.77,15.58 86.7,15.58 81.16,21.12 v79.84,21.12 | v21.4,58.86 44.25,58.86 v51.45,51.66
FLASH_CS
  Top 0.15: U1.1 35.46,57.76 33.1,57.76 21.88,46.54 21.88,46.26 U2.12
GDR
  Top 0.15: J1.2 90.3,14.75 90.3,14.4 87.25,11.36 71.67,11.36 68.97,14.06 68,14.06 67.52,14.54 67.52,17.66 67.24,17.94 Q3.1 67.31,18 68.07,18.77 68.83,18.77 69.8,17.8 70.43,17.8 R4.1
GND  (via drill 0.3, 0.35)
  Top 0.15: CHANGE_BUTTON.2 65.72,107.55 62.33,107.55 CHANGE_BUTTON.1 62.19,107.55 61.98,107.34 60.52,107.34 C10.2 60.45,107.27 59.97,106.78 51.45,106.78 50.76,107.48 BOOT_BUTTON.2 50.69,107.55 47.3,107.55 BOOT_BUTTON.1 47.23,107.55 47.02,107.34 45.77,107.34 C6.2 45.7,107.27 45.7,98.13 45.22,97.64 45.22,97.36 | 45.22,97.36 47.02,95.56 48.06,95.56 IC1.3 48.2,95.63 49.93,95.63 50.41,96.12 52.28,96.12 52.49,95.91 C_DELAY.2 52.56,95.91 54.43,97.78 76.17,97.78 TP5.TP 76.24,97.85 80.88,97.85 82.06,99.03 83.03,99.03 91.83,90.23 91.83,65.65 92.17,65.3 92.17,65.23 | D12.1 53.32,41.41 51.24,41.41 D11.1 51.18,41.41 45.77,41.41 D10.1 45.7,41.41 43.28,41.41 35.66,49.03 D9.1 | U1.9 39.33,55.82 37.53,54.02 35.52,54.02 U1.4 35.59,53.95 35.59,49.03 D9.1 | U2.29_1 12.33,52.28 12.33,53.46 U2.29_2 | U2.29_4 13.57,52.28 12.4,52.28 U2.29_1 | U2.29_5 13.57,53.46 13.57,52.35 U2.29_4 | U2.29_4 13.64,52.28 14.82,52.28 U2.29_7 14.82,52.35 14.82,53.46 U2.29_8 14.82,53.53 14.82,54.71 U2.29_9 14.82,54.78 13.64,54.78 U2.29_6 13.57,54.78 12.4,54.78 U2.29_3 12.4,54.85 7.89,59.35 7.89,63.71 U2.28 7.89,63.78 7.89,72.57 15.44,80.12 15.44,85.25 J4.G1 15.51,85.32 15.51,86.36 16.34,87.19 | v9.07,47.85 7.89,46.67 7.89,46.26 U2.1 | v12.33,51.11 12.33,52.22 U2.29_1 | 13.23,98.33 13.23,93.28 15.44,91.06 J4.G2 15.51,91 16.34,90.16 16.34,87.19 | 13.23,98.33 13.23,99.03 D8.1 | 5.5,95.88 5.12,95.5 2.29,95.5 J4.G4 2.22,95.43 1.25,94.46 1.25,82.34 J4.G3 | 5.5,95.88 6.3,96.67 6.3,100.9 C9.2 6.3,100.97 5.68,101.59 5.68,102.7 10.32,107.34 20.36,107.34 C5.2 20.43,107.41 22.09,107.41 22.23,107.55 RESET_BUTTON.1 22.3,107.55 25.69,107.55 RESET_BUTTON.2 25.76,107.61 26.04,107.89 28.74,107.89 29.09,107.55 29.09,107.27 20.15,98.33 13.23,98.33
  Top 0.15: 5.5,95.88 6.09,95.29 6.09,93.28 5.47,92.66 4.92,92.66 J4.P6 | v34.56,48.96 35.52,48.96 D9.1 | 45.22,97.36 35.11,97.36 24.52,86.77 16.83,86.77 16.41,87.19 16.34,87.19 | C1.2 156.64,5.75 158.03,5.75 C2.2 158.03,5.82 158.72,6.51 158.72,8.59 157.41,9.9 SENSOR2.5 | 156.12,10.56 156.3,10.73 156.92,10.73 157.41,10.25 157.41,9.97 SENSOR2.5 | 156.12,10.56 155.81,10.25 SENSOR2.7 | v154.36,13.16 154.57,12.95 154.98,12.95 SENSOR2.1 | 156.12,10.56 v155.74,10.94 | J3.1 165.23,17.8 165.02,17.8 157.47,10.25 SENSOR2.5 | R2-USB.2 146.12,49.17 149.51,49.17 149.86,49.51 D1.2 149.93,49.58 150.2,49.58 153.32,52.7 154.15,52.7 R2-USB1.1 154.22,52.77 v161.01,52.77 | J2.MP2 168.42,59.42 164.61,59.42 J2.MP4 164.47,59.35 163.98,58.86 163.98,57.69 J2.A12 163.98,57.62 163.98,57.41 J2.B1 163.91,57.34 163.43,57.34 v162.6,56.51 | C4_USB.2 151.17,46.95 151.17,45.77 C5_USB.2 151.17,45.7 151.17,41.62 | J2.B12 163.98,51.24 163.98,50.97 J2.A1 163.91,50.9 v163.01,50.9 | 151.17,41.62 151.66,41.13 154.29,41.13 163.08,49.93 v163.15,49.93 163.78,49.93 164.47,49.24 J2.MP3 164.61,49.17 168.42,49.17 J2.MP1 | SJ1.1 65.3,12.95 65.58,13.23 65.58,14.89 R2.1 65.65,14.96 65.65,17.52 67.38,19.25 70.43,19.25 | 70.43,19.25 71.74,17.94 71.74,17.8 R4.2 71.81,17.73 72.68,17.73 78.08,12.33 78.32,12.33 J1.MP2 78.39,12.33 80.75,12.33 82.65,14.23 | 70.43,19.25 70.43,20.22 71.12,20.91 EPD_C12.2 71.19,20.98 72.37,20.98 EPD_C11.2 72.37,21.05 74.51,23.2 74.51,25.48 D6.1 | EPD_C10.2 78.05,25.41 EPD_C9.2 | EPD_C9.2 79.98,25.41 EPD_C8.2 81.85,25.41 83.65,25.41 EPD_C7.2 83.79,25.41 EPD_C6.2 85.59,25.35 85.59,25.21 86.28,24.52 86.28,21.81 82.89,18.42 82.89,14.82 J1.17 82.82,14.75 82.82,14.4 82.65,14.23
  Top 0.15: C7.2 80.33,27.7 80.33,25.48 EPD_C9.2 | 82.65,14.23 83.72,13.16 86.7,13.16 87.32,13.78 87.32,14.75 J1.8 87.39,14.82 87.39,22.85 88.22,23.68 88.22,25.41 | 88.22,25.41 EPD_C1.2 89.47,25.48 90.03,26.04 | 88.22,25.41 87.53,25.41 EPD_C5.2 | 90.03,26.04 90.03,29.78 D3.1 89.96,29.78 84.76,34.97 84.76,47.16 87.67,50.07 87.67,50.14 | TP4.TP 111.7,3.88 108.38,3.88 99.98,12.27 95.46,12.27 95.44,12.25 95.06,12.25 95.03,12.28 J1.MP1 91.89,12.33 91.89,23.34 92.17,23.61 92.17,24.79 91.55,25.41 EPD_C2.2 91.48,25.48 90.92,26.04 90.03,26.04 | U3.13 85.73,53.74 85.73,53.46 86.98,52.22 86.98,50.83 C8.2 87.05,50.76 87.67,50.14 | 92.17,65.23 92.03,65.09 92.03,64.26 92.17,64.13 93.07,64.13 95.22,61.98 95.22,55.75 C10_SUPERCAP.1 | 92.17,65.23 93.28,65.23 96.47,62.05 96.47,52.98 | 96.47,52.98 93.63,50.14 87.67,50.14 | 119.7,40.34 119.46,40.58 119.32,40.58 IC4.2 | 119.7,40.34 119.94,40.1 119.94,39.33 118.76,38.16 117.52,38.16 C1_BAT1.2 117.45,38.09 116.75,37.4 115.79,37.4 113.22,39.96 113.08,39.96 R1_PWRUSB.1 113.02,40.03 100.07,52.98 96.47,52.98 | 119.7,40.34 121.47,42.1 122.57,42.1 123.75,40.93 125.69,40.93 C3.- 125.76,40.93 126.1,41.27 129.5,41.27 C1_BAT2.2 129.57,41.34 129.57,45.15 131.16,46.74 131.16,47.78 130.19,48.75 | U4.9 133.31,53.32 133.31,53.18 132.75,52.63 132.41,52.63 U4.4 132.34,52.63 132.08,52.63 131.37,52.63 | U4.6 134.28,53.12 133.31,53.12 U4.9 | U4.1 132.41,54.08 132.75,54.08 133.31,53.53 133.31,53.39 U4.9 | 131.37,52.63 128.32,52.63 C2_BAT.2 | 125.34,49.51 122.23,46.4 121.95,46.4 R2_BAT.1 121.88,46.4 121.33,46.4 116.27,51.45 C1_BAT.2
  Top 0.15: 125.34,49.51 125.34,50.21 124.79,50.76 124.51,50.76 MCP73831.2 | 125.34,49.51 125.41,49.51 126.24,48.68 130.05,48.68 130.19,48.82 130.19,48.75 | 151.17,41.62 149.23,41.62 148.75,41.13 147.16,41.13 141.13,47.16 141.13,48.34 135.04,54.43 133.86,54.43 133.17,53.74 U4.9 | 130.19,48.75 130.81,49.37 130.81,52.07 131.37,52.63
  Bottom 0.15: v9.07,47.85 v12.33,51.11 12.26,50.97 14.75,48.48 15.03,48.48 15.51,48.96 v34.56,48.96 | v155.74,10.94 155.74,11.84 155.19,12.4 155.12,12.4 v154.36,13.16 154.36,43.14 161.28,50.07 163.01,50.07 | 163.01,50.07 v163.01,50.9 163.01,50.97 162.53,51.45 162.53,52.77 | v163.15,49.93 163.01,50.07 | v162.6,56.51 162.6,54.71 162.53,54.64 162.53,52.77 | 162.53,52.77 v161.01,52.77
  other vias: 35.56,29.21 72.39,40.64 67.31,55.88 45.72,45.72 102.87,36.83 58.42,33.02 76.2,22.86 95.25,12.7 11.43,41.91 46.99,67.31 5.08,76.2 66.04,59.69 133.35,58.42 161.29,19.05 123.19,44.45 90.17,58.42 88.9,59.69 87.63,58.42 16.51,60.96 27.94,45.72 3.81,91.44 19.05,66.04 22.86,66.04 19.05,62.23 17.78,44.45 13.97,44.45 11.43,44.45 76.2,15.24
  pour Top: 176.45,-2.46 176.45,68.5 93.96,68.5 93.94,68.52 93.92,68.54 93.9,68.56 93.9,111.68 -2.46,111.68 -2.46,-2.46
  pour Bottom: 176.45,-2.46 176.45,68.5 93.96,68.5 93.94,68.52 93.92,68.54 93.9,68.56 93.9,111.68 -2.46,111.68 -2.46,-2.46
GPIO8
  Top 0.15: R1.2 19.11,43.84 19.11,46.05 19.25,46.19 U2.10
I2C_PW  (via drill 0.3)
  Top 0.15: 155.81,6.3 155.81,6.37 155.19,6.99 R2-PINH.2 155.19,7.06 155.19,8.79 155.54,9.14 155.54,9.21 | 155.81,6.3 155.81,5.26 155.67,5.12 154.63,5.12 154.5,5.26 154.5,5.96 153.67,6.79 153.67,6.99 R1_PINH.2 | 155.81,6.3 155.88,6.3 156.57,6.99 C1.1 156.64,6.99 C2.1 | 155.54,9.21 155.05,9.7 155.05,9.97 SENSOR2.8 155.05,10.04 v155.05,10.87 | 155.54,9.21 156.09,9.21 156.57,9.7 156.57,9.97 SENSOR2.6 | v155.05,11.91 155.74,12.6 155.74,12.88 SENSOR2.2 | v23.2,62.12 21.88,63.43 21.88,63.71 U2.17
  Bottom 0.15: v155.05,10.87 v155.05,11.91 154.98,11.91 153.87,13.02 153.87,44.04 135.8,62.12 v23.2,62.12
INT_RTC  (via drill 0.3)
  Top 0.15: v21.4,51.18 16.76,46.54 U2.8 | v86.98,61.63 86.98,63.02 U3.3 87.05,63.09 87.05,63.43 87.95,64.33 87.95,65.16 R1_PINH1.1 87.88,65.23 82.61,70.5 82.61,97.78 TP15.TP
  Bottom 0.15: v21.4,51.18 76.52,51.18 v86.98,61.63
IO/BOOT  (via drill 0.3)
  Top 0.15: R_BOOT.2 52.01,108.65 51.11,108.65 50.76,109 BOOT_BUTTON.3 50.69,109 50.21,109 49.17,107.96 48.41,107.96 47.3,109.07 BOOT_BUTTON.4 47.23,109 46.88,108.65 45.77,108.65 C6.1 45.7,108.58 v24.38,87.25 | v24.38,69.18 24.38,63.78 U2.15
  Bottom 0.15: v24.38,87.25 v24.38,69.18
IO/CHANGE  (via drill 0.3)
  Top 0.15: R_CHANGE.2 67.24,108.65 66.13,108.65 65.79,109 CHANGE_BUTTON.3 65.72,109 65.23,109 64.13,107.89 63.5,107.89 62.33,109.07 CHANGE_BUTTON.4 62.19,109 61.84,108.65 60.52,108.65 C10.1 60.45,108.58 v59.83,107.96 | v46.05,95.84 14.27,64.06 14.27,63.78 U2.23
  Bottom 0.15: v46.05,95.84 48.13,95.84 59.83,107.55 v59.83,107.96
MISO  (via drill 0.3)
  Top 0.15: J4.P7 5.05,93.69 4.57,93.69 2.56,91.69 2.56,68.63 TP6.TP 2.63,68.63 v4.64,68.63 | U1.2 35.52,56.58 35.52,56.85 36.15,57.48 36.15,58.1 35.87,58.38 14.27,58.38 9.14,63.5 9.14,63.71 U2.27 9.07,63.78 9.07,64.06 8.38,64.75 v8.38,64.89
  Bottom 0.15: v8.38,64.89 v4.64,68.63
MOSI  (via drill 0.3)
  Top 0.15: v13.92,43.14 15.44,44.67 15.44,46.19 U2.7 15.44,46.26 14.89,46.81 v14.89,48.96 | v12.12,41.34 2.56,31.79 TP7.TP | v14.89,80.19 5.82,89.26 5.12,89.26 J4.P3 | v84.42,13.99 84.35,14.06 84.35,14.75 J1.14 | v62.88,29.92 62.88,34.35 43.28,53.95 U1.5 43.21,53.95 v41.2,51.94
  Bottom 0.15: v12.12,41.34 v13.92,43.14 | v14.89,48.96 14.89,51.94 | 14.89,51.94 v14.89,80.19 | v84.42,13.99 84.14,13.99 82.61,15.51 77.28,15.51 v62.88,29.92 | v41.2,51.94 14.89,51.94
N$1
  Top 0.15: 116.13,38.99 116.13,38.16 C1_BAT1.1 | 116.13,38.99 115.58,39.54 D2.1 | 118.56,40.23 119.04,39.75 119.25,39.75 IC4.3 | 118.56,40.23 118.56,41 119.11,41.55 119.25,41.55 IC4.1 119.32,41.62 120.08,42.38 124.86,42.38 129.71,47.23 130.47,47.23 Q1.2 | 116.13,38.99 117.24,38.99 118.49,40.23 118.56,40.23
N$2
  Top 0.15: CHG_LED.C 118.69,51.45 118.69,50.21 R1_BAT.2
N$4
  Top 0.15: R1_BAT.1 120.08,50.21 121.05,50.21 121.19,50.34 123.75,50.34 124.23,49.86 124.44,49.86 MCP73831.1
N$5
  Top 0.15: EPD_C12.1 76.01,14.79 J1.24
N$6
  Top 0.15: C4.1 95.56,34.21 94.18,34.21 93.63,33.66 D4.1 93.56,33.59 93.56,29.85 D3.2
N$7
  Top 0.15: R2-USB.1 146.12,50.48 146.32,50.48 151.87,56.02 163.91,56.02 J2.B5
N$8
  Top 0.15: R2_BAT.2 121.95,47.64 121.95,49.79 MCP73831.5
N$9
  Top 0.15: IC1.5 50.97,97.44 52.28,97.44 52.49,97.23 C_DELAY.1
N$10
  Top 0.15: J1.22 80.33,14.82 80.33,21.81 78.05,24.1 EPD_C10.1
N$11
  Top 0.15: R2-USB1.2 154.22,51.45 161.84,51.45 163.43,53.05 163.91,53.05 J2.A5
N$12
  Top 0.15: D7.1 87.88,67.24 88.36,67.24 91.2,64.4 91.2,56.16 92.66,54.71 R_CAPACITOR.2
N$13
  Top 0.15: J1.20 81.37,14.82 81.37,23.68 81.78,24.1 EPD_C8.1
N$14
  Top 0.15: J1.19 81.85,14.82 81.85,22.3 83.65,24.1 EPD_C7.1
N$15
  Top 0.15: J1.18 82.41,14.82 82.41,20.91 85.59,24.1 EPD_C6.1
N$16
  Top 0.15: R8.1 53.32,37.53 53.32,39.89 D12.2
N$17
  Top 0.15: R7.1 51.18,37.53 51.18,39.89 D11.2
N$18
  Top 0.15: R6.1 45.7,37.53 45.7,39.89 D10.2
N$19
  Top 0.15: R5.1 33.73,47.58 35.52,47.58 D9.2
N$20
  Top 0.15: R9.1 72.78,27.91 73.68,27.91 76.04,25.55 D6.2
N$21
  Top 0.15: R10.1 8.93,100.9 12.88,100.9 14.68,99.1 D8.2
N$26
  Top 0.15: J1.5 88.78,14.82 88.78,23.61 88.71,23.68 88.71,24.52 88.92,24.72 90.92,24.72 91.48,24.17 EPD_C2.1
N$27
  Top 0.15: J1.4 89.4,14.82 89.4,24.1 EPD_C1.1
PREVGH
  Top 0.15: J1.21 80.81,14.82 80.81,23.27 79.98,24.1 EPD_C9.1 79.84,24.1 79.22,24.72 77.56,24.72 77.28,25 77.28,25.83 77.42,25.97 77.49,25.97 79.64,28.12 79.64,28.18 79.84,28.39 79.92,28.39 81.16,29.64 81.16,34.14 83.38,36.36 83.38,37.46 D5.1
PREVGL  (via drill 0.3)
  Top 0.15: 75.72,19.29 75.34,19.67 72.44,19.67 EPD_C11.1 | 75.72,19.29 79.78,15.23 79.78,14.82 J1.23 | v88.43,31.99 90.03,33.59 D4.2 | v75.76,19.32 75.72,19.29
  Bottom 0.15: v75.76,19.32 v88.43,31.99
RESE
  Top 0.15: J1.3 89.82,14.75 89.82,14.4 87.05,11.63 71.81,11.63 68.83,14.61 68.63,14.61 R3.1 68.56,14.68 68.56,17.94 Q3.2
RESE'
  Top 0.15: R3.2 68.56,13.3 67.17,13.3 66.83,12.95 SJ1.2 67.17,13.37 66.97,13.57 66.97,14.89 R2.2
RESET  (via drill 0.3)
  Top 0.15: C5.1 21.88,108.65 22.23,109 RESET_BUTTON.4 22.3,109 22.78,109 23.82,107.96 24.58,107.96 25.69,109.07 RESET_BUTTON.3 25.76,109 26.11,108.65 27.56,108.65 R_RESET.2 27.63,108.58 27.84,108.38 v34.83,108.38 | v45.7,97.5 48.13,97.5 IC1.1 | v9.07,48.48 10.39,47.16 10.39,46.26 U2.3
  Bottom 0.15: v34.83,108.38 39.22,103.99 | 39.22,103.99 v45.7,97.5 | v9.07,48.48 9.07,64.19 14.4,69.53 14.4,80.01 14.4,80.4 14.4,81.71 36.68,103.99 39.22,103.99
RTC_RST
  Top 0.15: U2.16 23.13,63.71 23.13,63.5 24.79,61.84 84.83,61.84 85.66,62.67 85.66,63.02 U3.4
RX
  Top 0.15: U2.24 12.95,63.78 12.95,65.3 16.07,68.42 TP2.TP
SCK  (via drill 0.3)
  Top 0.15: v12.05,43.84 14.2,45.98 14.2,46.19 U2.6 | 8.9,43.17 2.56,36.84 TP8.TP | 8.9,43.17 v9.56,43.84 | J4.P5 5.05,91.48 4.5,91.48 3.88,90.86 3.88,70.01 6.92,66.97 6.92,45.72 6.92,45.57 6.92,43.88 7.63,43.17 8.9,43.17 | v84.42,15.58 84.83,15.17 84.83,14.82 J1.13 | v63.5,29.92 63.5,34.97 43.28,55.19 U1.6 43.21,55.19 v37.53,49.51
  Bottom 0.15: v9.56,43.84 v12.05,43.84 31.86,43.84 v37.53,49.51 | v84.42,15.58 82.96,15.58 82.75,15.79 77.63,15.79 v63.5,29.92
SCL  (via drill 0.3)
  Top 0.15: 135.21,53.01 140.58,47.64 140.58,25.76 154.91,11.43 | 135.21,53.01 134.69,53.53 134.34,53.53 U4.7 | 154.91,11.43 156.3,11.43 157.41,12.53 SENSOR2.4 157.47,12.95 157.47,13.3 164.95,20.77 165.23,20.77 J3.4 | R2-PINH.1 155.12,5.75 155.12,5.89 154.5,6.51 154.5,10.94 154.91,11.36 154.91,11.43 | U2.20 18.07,63.78 18.07,67.31 20.43,69.67 80.75,69.67 86.49,63.92 86.49,57.13 89.47,54.15 89.47,53.81 U3.16 89.54,53.74 89.82,53.46 v90.23,53.46 | v135.11,52.98 135.18,52.98 135.21,53.01
  Bottom 0.15: v135.11,52.98 90.72,52.98 v90.23,53.46
SDA  (via drill 0.3)
  Top 0.15: v152.9,6.37 152.97,6.37 153.6,5.75 R1_PINH.1 | v156.23,11.98 156.23,12.26 156.57,12.6 156.57,12.88 SENSOR2.3 156.64,12.95 156.64,19.48 161.61,24.45 161.61,25.72 | 135.07,53.63 140.85,47.85 140.85,46.47 161.61,25.72 | 135.07,53.63 134.62,54.08 U4.8 | 161.61,25.72 166.13,21.19 166.13,20.36 165.58,19.8 165.3,19.8 J3.3 | 86.53,55.85 88.22,54.15 88.22,53.81 U3.15 | 86.53,55.85 83.65,58.72 24.1,58.72 19.32,63.5 19.32,63.71 U2.19 | v135.11,53.74 135.11,53.67 135.07,53.63 | v86.56,55.88 86.53,55.85
  Bottom 0.15: v152.9,6.37 152.9,7.48 156.23,10.8 v156.23,11.98 | v135.11,53.74 93.07,53.74 89.61,57.2 87.88,57.2 v86.56,55.88
SRC  (via drill 0.3)
  Top 0.15: v85.25,35.59 95.56,35.59 C4.2 | D5.2 v81.78,35.59 81.78,35.52 79.43,33.17 79.43,32.41 L1.1 | v74.37,26.59 67.93,20.15 Q3.3
  Bottom 0.15: v85.25,35.59 v81.78,35.59 81.78,31.79 76.59,26.59 v74.37,26.59
SS_SD
  Top 0.15: J4.P2 5.54,88.16 7.2,86.49 7.2,50.97 11.63,46.54 11.63,46.26 U2.4
TX
  Top 0.15: U2.25 11.7,63.78 11.7,68.42 TP1.TP
USB_D+  (via drill 0.3)
  Top 0.15: v148.06,50.48 149.86,50.48 D1.1 | v28.39,52.42 28.39,50.28 U2.14
  Bottom 0.15: v148.06,50.48 147.85,50.48 135.73,62.6 23.06,62.6 20.91,60.45 20.91,58.72 27.21,52.42 v28.39,52.42
USB_D-  (via drill 0.3)
  Top 0.15: v146.81,48.54 149.86,48.54 D1.3 | v26.04,49.44 23.13,46.54 23.13,46.26 U2.13
  Bottom 0.15: v146.81,48.54 129.15,48.54 113.08,32.48 82.89,32.48 76.52,26.11 68.77,26.11 44.6,50.28 26.87,50.28 v26.04,49.44
VBAT
  Top 0.3: U4.3 132.34,53.12 132.34,53.53 U4.2 132.2,53.6 131.92,53.6 131.57,53.95 | 131.57,53.95 128.32,53.95 C2_BAT.1 128.18,53.88 127.49,53.18 127.49,52.22 | 127.49,52.22 129.5,50.21 129.5,49.38 Q1.3 | MCP73831.3 124.51,51.8 127,51.8 127.35,52.15 127.49,52.22 | TP3.TP 147.29,64.75 142.1,64.75 131.64,54.29 131.64,54.08 131.57,53.95
VBUS
  Top 0.3: R1_PWRUSB.2 113.08,41.34 115.16,41.34 115.51,41.69 D2.2 115.72,41.69 116.2,42.17 | 116.2,42.17 118.97,42.17 124.03,47.23 128.53,47.23 Q1.1 | 116.2,42.17 116.13,42.31 115.02,43.42 115.02,51.38 C1_BAT.1 114.95,51.52 115.72,52.28 119.32,52.28 120.01,51.59 CHG_LED.A 120.15,51.52 121.67,51.52 121.88,51.73 MCP73831.4 122.02,51.8 123.27,51.8 137.53,66.06 147.85,66.06 148.61,65.3 148.61,63.5 147.43,62.33 TP14.TP 147.29,62.19 147.29,52.91 145.29,50.9 145.29,48.68 145.98,47.99 147.99,47.99 | C5_USB.1 152.49,45.77 152.49,46.95 C4_USB.1 151.45,47.99 | 151.45,47.99 151.45,48.96 152,49.51 152.35,49.51 D1.5 | 151.45,47.99 147.99,47.99 | 147.99,47.99 147.99,43.21 PFMF.050.1.2
VRTC
  Top 0.15: C10_SUPERCAP.2 95.22,53.46 95.15,53.39 92.73,53.39 R_CAPACITOR.1 92.66,53.32 90.72,53.32 89.61,52.22 88.22,52.22 | 88.22,52.22 88.22,50.83 C8.1 | 88.22,52.22 87.05,53.39 87.05,53.74 U3.14
VUSB  (via drill 0.3)
  Top 0.3: J2.A4 163.98,51.8 163.98,52.01 J2.B9 164.12,52.08 164.61,52.08 v164.95,52.42 | J2.A9 163.98,56.78 163.98,56.58 J2.B4 164.12,56.51 164.68,56.51 v164.95,56.23 | v155.05,43.21 152.49,43.21 PFMF.050.1.1
  Bottom 0.3: v164.95,56.23 164.68,55.95 164.68,54.08 164.95,53.81 v164.95,52.42 164.88,52.28 163.71,51.11 163.71,49.72 157.2,43.21 v155.05,43.21